# EAGLE board Sample1 (EAGLE 9.6.2)

Size 111.74 x 77.14 mm. Coordinates in mm from the lower left corner, seen from the top.
Outline: 0,0 111.74,0 111.74,77.14 0,77.14 0,0
Copper layers (1*16): Top 0.035mm / dielectric 1.5mm / Bottom 0.035mm
Design rules "default": minimum track width 6mil, minimum drill 0.35mm, track to track 6mil, track to pad 6mil, pad to pad 6mil, via to via 6mil, smd to smd 6mil, copper to edge 40mil, drill to drill 6mil, minimum pad ring 10mil, minimum via ring 8mil, stop-mask expansion 4mil, vias tented up to drill 0mil, thermal gap 10mil

## Footprints (pad centres in the part's own frame; a part is rotated, then mirrored left to right if it is on the bottom)
0603 = smd 1.1 x 1: 1 -0.85,0; 2 0.85,0

## Placement (x,y rotation side)
R1  390k  [0603]  71.12,72.39 0 top
R2  390k  [0603]  40.64,3.81 90 top
R3  390k  [0603]  15.24,59.69 0 top
R4  390k  [0603]  10.16,55.88 0 top
R5  390k  [0603]  58.42,62.23 0 top

## Library data of the parts
R1-R5 = SparkFun-Resistors; PROD_ID: RES-12024

## Nets
N$1: R1.2 R2.1
N$2: R3.2 R4.1
N$3: R2.2 R4.2 R5.1
N$4: R1.1 R3.1 R5.2

## Tracks (layer width: path | path; a pad name or v marks a point on that pad's centre or on a via)
N$1  (1 unrouted)
N$2  (1 unrouted)
N$3  (2 unrouted)
N$4  (2 unrouted)